# EAGLE board PulseOximeter (EAGLE 9.6.2)
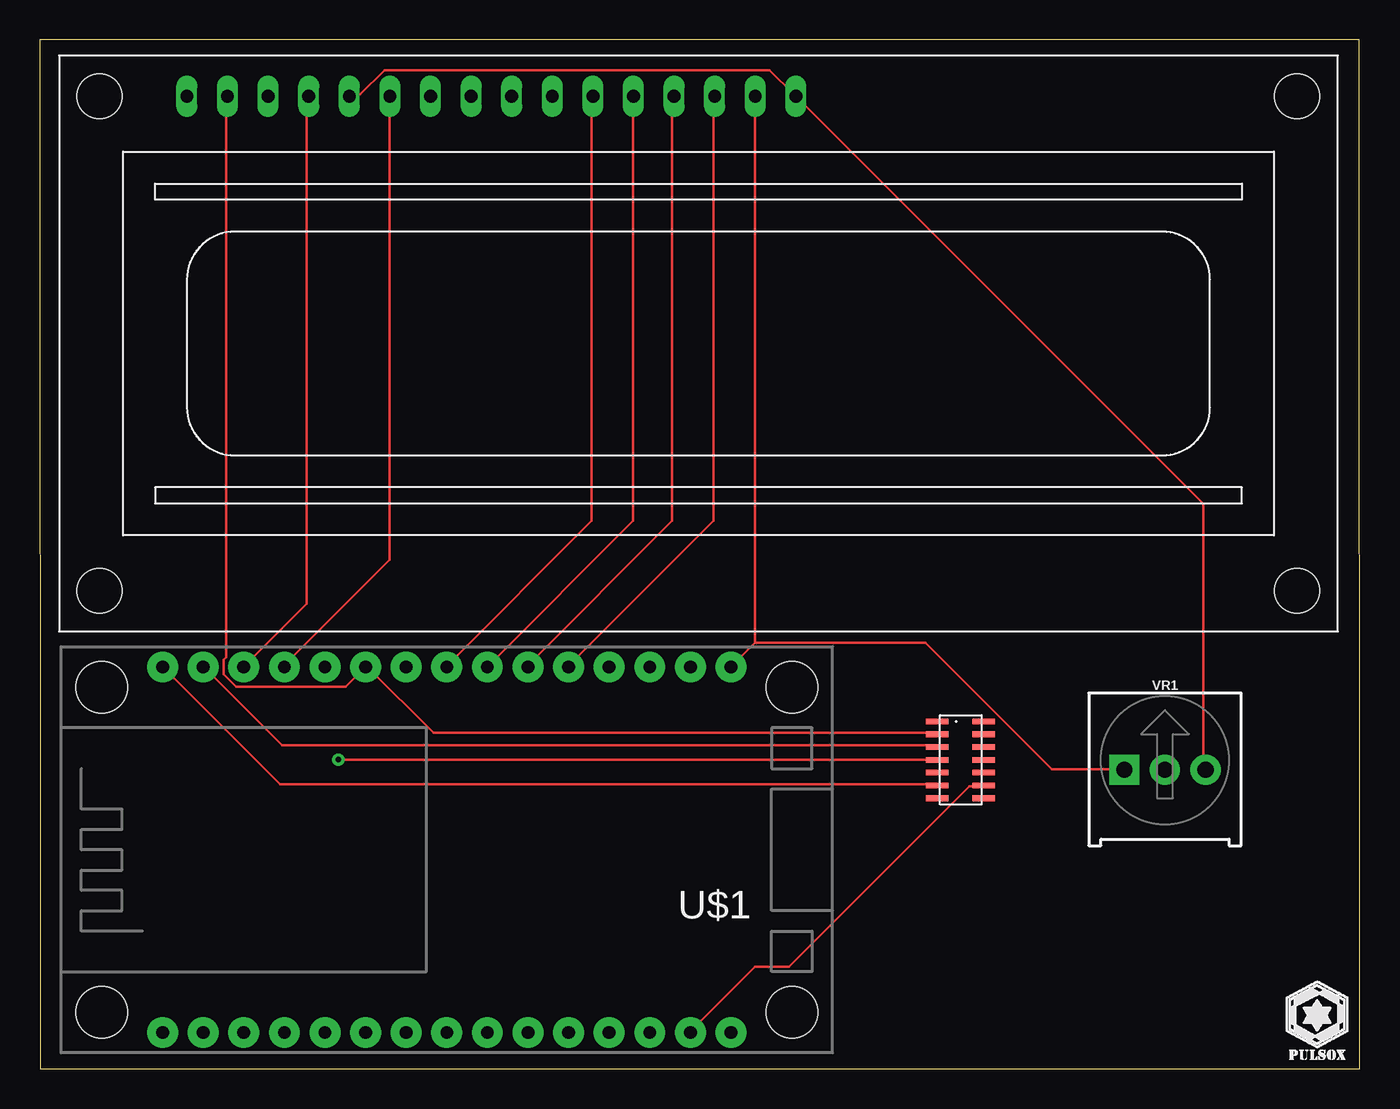
[diagram p0: board, top side]
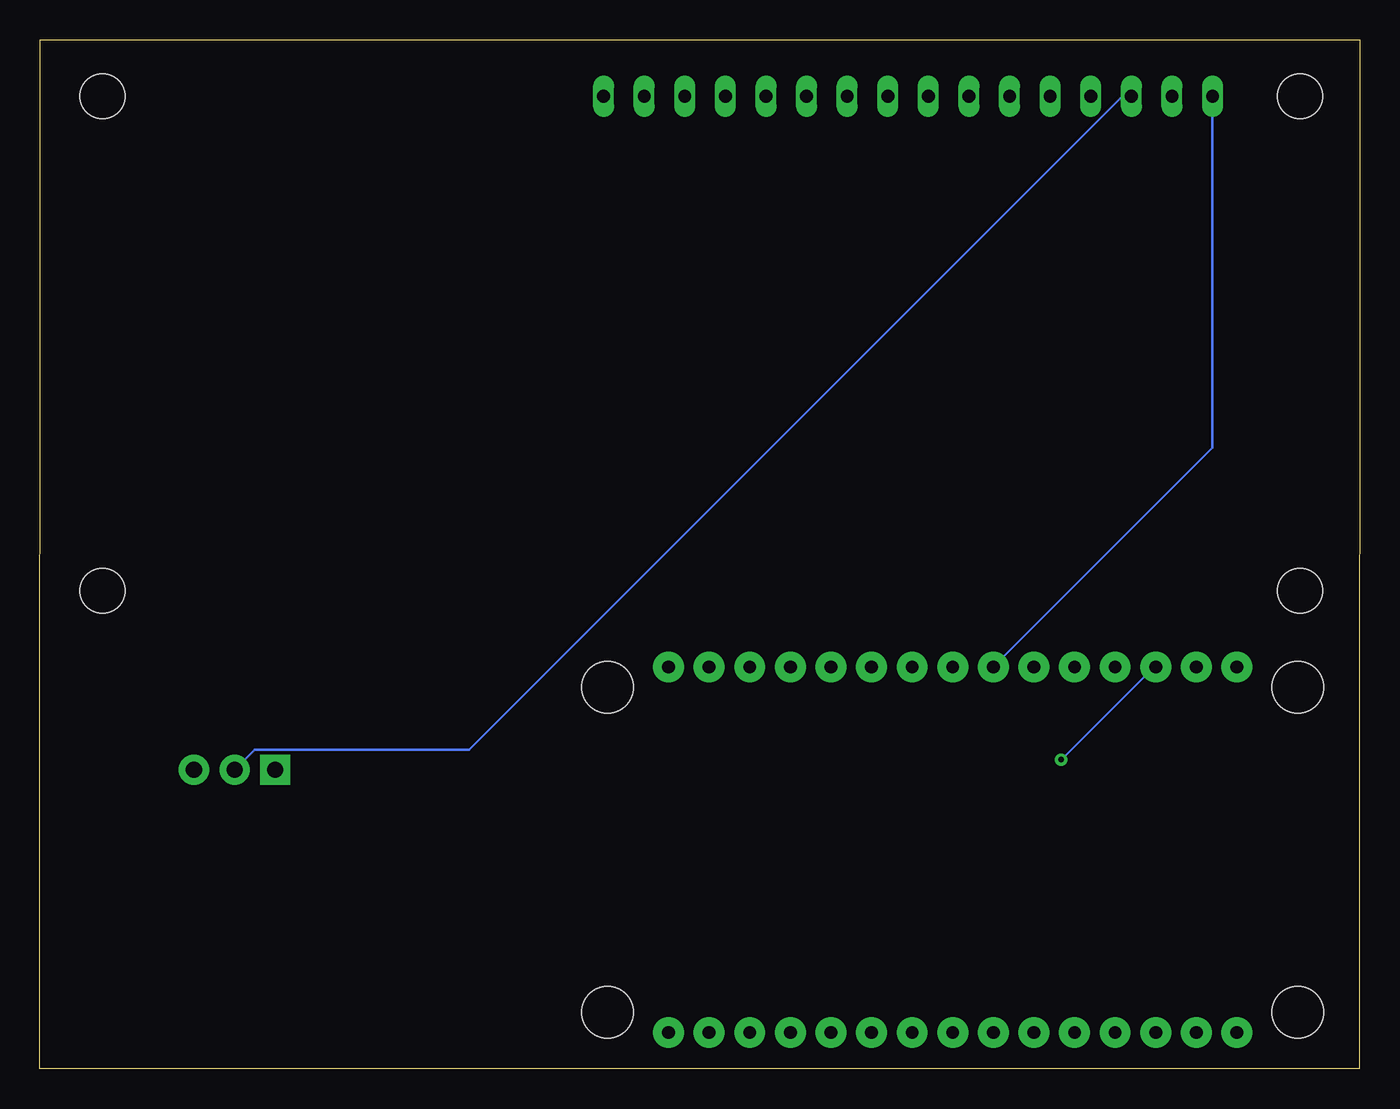
[diagram p1: board, bottom side, seen from below]

Size 82.56 x 64.34 mm. Coordinates in mm from the lower left corner, seen from the top.
Outline: 0.03,0 82.56,0 82.53,64.34 0,64.34 0.03,0
Copper layers (1*16): Top 0.035mm / dielectric 1.5mm / Bottom 0.035mm
Design rules "default": minimum track width 6mil, minimum drill 0.35mm, track to track 6mil, track to pad 6mil, pad to pad 6mil, via to via 6mil, smd to smd 6mil, copper to edge 40mil, drill to drill 6mil, minimum pad ring 10mil, minimum via ring 8mil, stop-mask expansion 4mil, vias tented up to drill 0mil, thermal gap 10mil

## Footprints (pad centres in the part's own frame; a part is rotated, then mirrored left to right if it is on the bottom)
MAX30100 = smd 1.397 x 0.35: 1 -0.381,4.8; 2 -0.381,4; 3 -0.381,3.2; 4 -0.381,2.4; 5 -0.381,1.6; 6 -0.381,0.8; 7 -0.381,0; 8 2.531,0; 9 2.531,0.8; 10 2.531,1.6; 11 2.531,2.4; 12 2.531,3.2; 13 2.531,4; 14 2.531,4.8
ESP12E_DEVKIT = drill 0.8 pad 1.93: 3V3@0 -11.43,-7.62; 3V3@1 11.43,5.08; 3V3@2 11.43,-17.78; AD0 -11.43,17.78; CLK -11.43,-2.54; CMD -11.43,2.54; D0 11.43,17.78; D1 11.43,15.24; D2 11.43,12.7; D3 11.43,10.16; D4 11.43,7.62; D5 11.43,0; D6 11.43,-2.54; D7 11.43,-5.08; D8 11.43,-7.62; EN -11.43,-10.16; GND@0 -11.43,-5.08; GND@1 -11.43,-15.24; GND@2 11.43,2.54; GND@3 11.43,-15.24; RST -11.43,-12.7; RSV@0 -11.43,15.24; RSV@1 -11.43,12.7; RX 11.43,-10.16; SD0 -11.43,0; SD1 -11.43,5.08; SD2 -11.43,7.62; SD3 -11.43,10.16; TX 11.43,-12.7; VIN -11.43,-17.78 | hole 3.2: -10.16,21.59; 10.16,21.59; 10.16,-21.59; -10.16,-21.59
TRIMPOT-PTH-3386U = drill 1.016 pad 1.88 square: 1 -2.54,-0.015 | drill 1.016 pad 1.88: 2 0,-0.015; 3 2.54,-0.015
LCD1602 = drill 0.8 long: 1 8,33.46; 2 10.54,33.46; 3 13.08,33.46; 4 15.62,33.46; 5 18.16,33.46; 6 20.7,33.46; 7 23.24,33.46; 8 25.78,33.46; 9 28.32,33.46; 10 30.86,33.46; 11 33.4,33.46; 12 35.94,33.46; 13 38.48,33.46; 14 41.02,33.46; 15 43.56,33.46; 16 46.1,33.46 | hole 2.8: 2.54,2.54; 2.54,33.46; 77.46,33.46; 77.46,2.54

## Placement (x,y rotation side)
MAX30100  MAX30100  [MAX30100]  56.51,16.92 0 top
U$1  ESP12E_DEVKIT  [ESP12E_DEVKIT]  25.45,13.69 90 top
VR1  10k  [TRIMPOT-PTH-3386U]  70.38,18.72 0 top
X1  HD44780LCD-1602  [LCD1602]  1.19,27.35 0 top

## Library data of the parts
MAX30100 = MAX30100
U$1 = ESP12E_DEVKIT
VR1 = SparkFun-Resistors; PROD_ID: RES-09730; SF_SKU: COM-09806
X1 = adafruit

## Nets
0: VR1.3 X1.5 X1.16
N$2: MAX30100.3 U$1.D1
N$3: MAX30100.4 U$1.D2 X1.4
N$4: MAX30100.6 U$1.D0
N$5: MAX30100.9 U$1.GND@1
N$6: U$1.D8 X1.14
N$7: U$1.D7 X1.13
N$8: U$1.D6 X1.12
N$9: U$1.D5 X1.11
N$10: U$1.D3 X1.6
N$11: VR1.2 X1.3
VCC: U$1.3V3@2 VR1.1 X1.15
VDD: MAX30100.2 U$1.3V3@1 X1.2
VSS: U$1.GND@2 X1.1

## Tracks (layer width: path | path; a pad name or v marks a point on that pad's centre or on a via)
0
  Top 0.152: X1.5 19.43,60.93 20.04,60.93 21.56,62.46 45.64,62.46 47.17,60.93 X1.16 47.32,60.78 72.77,35.33 72.77,18.72 VR1.3
N$2
  Top 0.152: MAX30100.3 56.01,20.24 15.16,20.24 10.29,25.12 U$1.D1
N$3  (via drill 0.35)
  Top 0.152: v18.67,19.33 56.01,19.33 MAX30100.4 | X1.4 16.69,60.78 16.69,29.08 12.88,25.27 U$1.D2
  Bottom 0.152: v18.67,19.33 12.88,25.12 U$1.D2
N$4
  Top 0.152: MAX30100.6 56.01,17.8 15.01,17.8 7.7,25.12 U$1.D0
N$5
  Top 0.152: MAX30100.9 58.9,17.65 58.14,17.65 46.86,6.37 44.73,6.37 40.77,2.41 U$1.GND@1
N$6
  Top 0.152: X1.14 42.14,60.78 42.14,34.26 33.15,25.27 U$1.D8
N$7
  Top 0.152: X1.13 39.55,60.78 39.55,34.26 30.56,25.27 U$1.D7
N$8
  Top 0.152: X1.12 37.11,60.78 37.11,34.26 28.12,25.27 U$1.D6
N$9
  Top 0.152: X1.11 34.52,60.78 34.52,34.26 25.53,25.27 U$1.D5
N$10
  Top 0.152: X1.6 21.87,60.78 21.87,31.82 15.32,25.27 U$1.D3
N$11
  Bottom 0.152: X1.3 14.4,60.78 14.86,60.78 55.7,19.94 69.11,19.94 70.33,18.72 VR1.2
VCC
  Top 0.152: 44.73,26.64 44.73,60.78 X1.15 | 44.73,26.64 43.36,25.27 U$1.3V3@2 | 44.73,26.64 55.4,26.64 63.32,18.72 67.74,18.72 VR1.1
VDD
  Top 0.152: MAX30100.2 56.01,21 24.61,21 20.5,25.12 U$1.3V3@1 20.35,25.12 19.13,23.9 12.27,23.9 11.51,24.66 11.51,25.58 11.66,25.73 11.66,60.78 X1.2
VSS
  Bottom 0.152: X1.1 9.22,60.78 9.22,38.83 22.78,25.27 U$1.GND@2